# Altium PCB laser_show.PcbDoc (part 2 of 2)
Units mm, origin at the board's own origin, x right, y up, seen from the top; angles counter-clockwise.
Board outline 180 x 50 mm, 2 copper layers (Top Layer, Bottom Layer); 129 components, 122 nets, 459 pads, 223 vias.
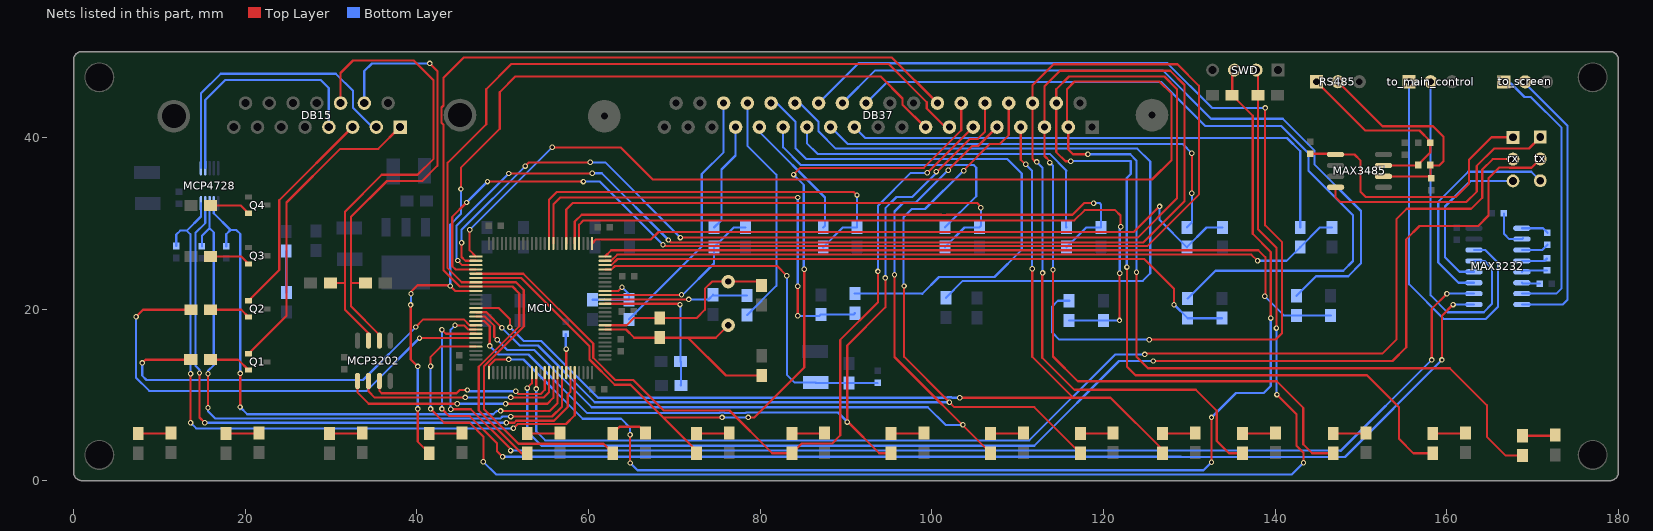
[diagram p2: the nets of this part, all layers, seen from the top]

## Via types
v1: diameter 0.635, hole 0.381, Top Layer to Bottom Layer, 223 vias

## Nets (pads, with @x,y where several pads share a name; then routed paths per layer and width w, separated by ;. In a path a pad name is that pad's centre, name@x,y a point inside that pad or via, vN(x,y) a via of type N, cw(c..) or ccw(c..) an arc to the next point about the centre after c; other vN are vias at no path point) (continued)
green_channel1_adc_con: DB37.32 R45.2 | length 82.9
  Bottom Layer w0.254: DB37.32@84.045,43.993 84.604,43.993 86.813,41.783 86.813,40.691 88.82,38.684 123.948,38.684 125.447,37.186 125.447,24.155 124.571,23.279 103.616,23.279 R45.2@101.647,21.311
green_channel1_state: DB37.5 led7.2 MCU.65 | length 111.6
  Top Layer w0.254: MCU.65@46.878,19.117 47.935,19.117 49.018,18.034 49.018,16.764 v1(49.374,16.408) ; v1(95.653,23.978) 95.653,14.403 led7.2@106.855,3.2 ; v1(101.901,36.17) 101.876,36.17 104.695,38.989 105.381,38.989 DB37.5@107.591,41.199
  Bottom Layer w0.254: v1(49.374,16.408) 50.568,15.215 53.717,15.215 60.372,8.56 99.539,8.56 101.596,6.502 v1(103.628,6.502) ; v1(95.653,23.978) 95.653,31.369 96.694,32.41 98.116,32.41 101.876,36.17 v1(101.901,36.17)
green_channel2_adc: MCU.32 R47.1 R48.2 | length 60.2
  Top Layer w0.254: MCU.32@57.403,27.642 57.403,31.6 58.162,32.36 105.279,32.36 105.711,31.928 v1(105.711,31.801)
  Bottom Layer w0.254: R47.1@101.52,27.203 103.806,29.489 R48.2@105.533,29.489 105.711,29.667 v1(105.711,31.801)
green_channel2_adc_con: DB37.14 R47.2 | length 34.3
  Bottom Layer w0.254: DB37.14@82.673,41.199 82.673,38.837 84.731,36.779 104.873,36.779 105.178,36.474 105.178,33.147 R47.2@101.52,29.489
green_channel2_state: DB37.24 led8.2 MCU.66 | length 101.9
  Top Layer w0.254: MCU.66@46.878,18.617 47.826,18.617 48.485,17.958 v1(48.485,15.697) ; v1(94.586,23.622) 94.586,20.193 90.141,15.748 v1(90.141,6.833) 90.242,6.833 93.875,3.2 led8.2@95.264,3.2 ; v1(100.529,36.017) 100.529,35.916 104.441,39.827 105.355,39.827 106.194,40.665 DB37.24@106.194,43.993
  Bottom Layer w0.254: v1(48.485,15.697) 49.488,14.694 53.019,14.694 59.839,7.874 75.261,7.874 75.324,7.938 75.798,7.938 75.861,7.874 78.309,7.874 78.372,7.938 89.061,7.938 90.166,6.833 v1(90.141,6.833) ; v1(94.586,23.622) 94.586,31.75 95.881,33.045 97.735,33.045 100.529,35.839 v1(100.529,36.017)
green_channel3_adc: MCU.35 R49.1 R50.2 | length 53.9
  Top Layer w0.254: MCU.35@55.903,27.642 55.903,32.183 56.714,32.995 v1(84.375,32.995) ; v1(84.375,19.202) v1(84.375,22.657)
  Bottom Layer w0.254: v1(84.375,19.202) 86.915,19.202 R50.2@87.067,19.355 90.877,19.355 R49.1@91.03,19.507 ; v1(84.375,22.657) v1(84.375,32.995)
green_channel3_adc_con: DB37.33 R49.2 | length 64.9
  Bottom Layer w0.254: DB37.33@81.276,43.993 81.937,43.993 84.121,41.808 84.121,38.735 85.391,37.465 108.81,37.465 110.486,35.789 110.486,26.899 107.311,23.724 100.834,23.724 98.878,21.768 98.853,21.793 R49.2@91.03,21.793
green_channel3_state: DB37.6 led9.2 MCU.55 | length 96.5
  Top Layer w0.254: MCU.55@46.878,24.117 52.41,24.117 60.55,15.977 60.55,14.309 63.141,11.718 65.232,11.718 68.772,8.179 76.425,8.179 81.403,3.2 led9.2@83.699,3.2 84.816,4.318 88.363,4.318 89.328,5.283 89.328,16.408 93.722,20.803 v1(93.722,24.384) ; v1(99.463,35.865) 99.463,35.839 DB37.6@104.822,41.199
  Bottom Layer w0.254: v1(93.722,24.384) 93.722,32.029 97.558,35.865 v1(99.463,35.865)
green_channel4_adc: MCU.36 R51.1 R52.2 | length 50.2
  Top Layer w0.254: MCU.36@55.403,27.642 55.403,32.725 56.308,33.63 90.903,33.63 91.258,33.274 v1(91.284,33.274)
  Bottom Layer w0.254: R51.1@87.347,27.203 89.633,29.489 R52.2@91.284,29.489 v1(91.284,33.274)
green_channel4_adc_con: DB37.15 R51.2 | length 15
  Bottom Layer w0.254: DB37.15@79.905,41.199 79.905,40.64 87.55,32.995 87.55,29.693 R51.2@87.347,29.489
green_channel4_state: DB37.25 led10.2 MCU.56 | length 101.9
  Top Layer w0.254: MCU.56@46.878,23.617 52.148,23.617 60.118,15.646 60.118,14.117 63.059,11.176 64.893,11.176 68.703,7.366 ; led10.2@72.59,3.2 72.59,3.479 68.703,7.366 ; v1@75.536,7.366 68.703,7.366 ; v1(78.609,7.366) 79.32,7.366 85.137,13.183 v1(85.137,24.638) ; v1(83.892,35.662) 83.867,35.662 84.654,36.449 99.056,36.449 103.425,40.818 DB37.25@103.425,43.993
  Bottom Layer w0.254: v1(75.561,7.366) v1(78.609,7.366) ; v1(83.892,35.662) 85.086,34.468 85.086,24.689 v1(85.137,24.638)
green_channel5_adc: MCU.15 R53.1 R54.2 | length 16.8
  Top Layer w0.254: MCU.15@61.928,21.117 61.95,21.095 71.644,21.095 v1(71.666,21.117)
  Bottom Layer w0.254: v1(71.666,21.117) 73.97,21.117 R54.2@74.52,21.666 74.596,21.59 R53.1@78.482,21.59
green_channel5_adc_con: DB37.34 R53.2 | length 27.5
  Bottom Layer w0.254: R53.2@78.482,19.304 81.886,22.708 81.886,35.662 78.508,39.04 DB37.34@78.508,43.993
green_channel5_state: DB37.7 led11.2 MCU.57 | length 124.7
  Top Layer w0.254: led11.2@62.328,3.2 led11.2@62.828,3.2 61.736,4.293 51.838,4.293 47.824,8.306 47.824,13.335 52.447,17.958 52.447,22.225 51.555,23.117 MCU.57@46.878,23.117 45.231,23.117 43.583,24.765 43.583,37.033 48.078,41.529 48.078,45.618 50.999,48.539 94.967,48.539 99.412,44.094 99.412,43.358 101.571,41.199 DB37.7@102.053,41.199
green_channel6_adc: MCU.16 R55.1 R56.2 | length 20.8
  Top Layer w0.254: MCU.16@61.928,21.617 70.734,21.617 70.783,21.666 v1(70.837,21.666)
  Bottom Layer w0.254: v1(70.837,21.666) 70.913,21.59 74.621,25.298 R55.1@74.621,27.203 76.907,29.489 R56.2@78.304,29.489
green_channel6_adc_con: DB37.16 R55.2 | length 12.8
  Bottom Layer w0.254: R55.2@74.621,29.489 75.485,30.353 75.485,36.246 77.136,37.897 DB37.16@77.136,41.199
green_channel6_state: DB37.26 led12.2 MCU.58 | length 116.6
  Top Layer w0.254: led12.2@52.863,3.2 52.193,3.2 47.215,8.179 47.215,13.268 51.939,17.992 51.939,21.819 51.141,22.617 MCU.58@46.878,22.617 44.994,22.617 43.1,24.511 43.1,41.473 42.871,41.702 42.871,43.49 43.1,43.719 43.1,46.939 45.462,49.301 95.348,49.301 DB37.26@100.656,43.993
green_channel7_adc: MCU.17 R57.1 R58.2 | length 8.2
  Top Layer w0.254: MCU.17@61.928,22.117 63.49,22.117 v1(63.903,22.53)
  Bottom Layer w0.254: R58.2@60.448,21.082 R57.1@64.715,21.082 64.715,21.717 v1(63.903,22.53)
green_channel7_adc_con: DB37.35 R57.2 | length 29.8
  Bottom Layer w0.254: R57.2@64.715,18.796 73.199,27.28 73.199,35.738 75.739,38.278 DB37.35@75.739,43.993
green_channel7_state: DB37.8 led13.2 MCU.59 | length 106.1
  Top Layer w0.254: v1@39.29,20.472 39.29,14.122 v1(40.103,13.31) ; v1(39.315,21.793) 39.315,22.022 40.065,22.771 43.799,22.771 v1(43.887,22.682) 44.453,22.117 MCU.59@46.878,22.117 ; v1(40.103,8.356) 40.103,4.547 led13.2@41.449,3.2 ; v1(45.132,33.985) 45.132,36.474 49.653,40.996 49.653,45.263 51.482,47.092 94.032,47.092 96.592,44.531 96.592,43.815 99.209,41.199 DB37.8@99.285,41.199
  Bottom Layer w0.254: v1(39.265,20.472) 39.315,20.472 v1(39.315,21.793) ; v1(40.103,8.356) v1(40.103,13.31) ; v1(43.887,22.682) 43.887,29.82 45.132,31.064 v1(45.132,33.985)
green_dac_output: DB15.4 MCP4728.7 | length 28.2
  Bottom Layer w0.254: MCP4728.7@15.347,36.416 15.347,44.357 17.675,46.685 28.8,46.685 29.74,45.745 DB15.4@29.74,41.199
green_enable: DB15.3 Q2.3 | length 25.3
  Top Layer w0.254: Q2.3@20.384,20.965 23.974,24.555 23.974,32.664 DB15.3@32.508,41.199
green_enable_pin: MCU.70 R12.2 | length 56.6
  Top Layer w0.254: v1(7.286,19.101) 8.099,19.914 R12.2@13.687,19.914 ; v1(40.311,16.617) MCU.70@46.878,16.617
  Bottom Layer w0.254: v1(7.286,19.101) 7.286,11.989 8.81,10.465 34.159,10.465 v1(40.311,16.617)
head_temp: DB15.11 MCP3202.3 R32.1 | length 55.9
  Top Layer w0.254: R32.1@29.917,23.038 31.645,23.038 ; DB15.11@31.187,43.993 DB15.11@31.111,43.993 31.111,47.498 32.559,48.946 39.646,48.946 41.957,46.634 41.957,37.516 40.077,35.636 35.912,35.636 31.645,31.369 31.645,23.038 ; MCP3202.3@34.366,16.32 34.366,17.17 31.645,19.892 31.645,23.038
I2C1_SCL: MCP4728.2 MCU.92 R10.1 | length 69.2
  Top Layer w0.254: v1(19.402,8.585) 19.427,8.585 v1(19.427,12.497) ; v1(49.755,8.128) 55.47,8.128 56.403,9.061 MCU.92@56.403,12.592
  Bottom Layer w0.254: MCP4728.2@16.347,32.316 16.347,31.148 18.284,29.21 ; R10.1@17.802,27.318 17.802,28.727 18.284,29.21 ; v1@19.402,8.331 v1(19.402,8.585) 20.24,7.747 48.917,7.747 49.298,8.128 v1(49.755,8.128) ; v1(19.427,12.497) 19.427,28.753 18.97,29.21 18.284,29.21
I2C1_SDA: MCP4728.3 MCU.93 R9.1 | length 73.3
  Top Layer w0.254: v1(15.668,8.484) v1(15.668,12.446) ; v1(50.949,7.468) 55.749,7.468 56.903,8.621 MCU.93@56.903,12.592
  Bottom Layer w0.254: R9.1@14.957,27.292 14.957,28.523 15.847,29.412 ; v1(15.668,8.484) 15.668,8.103 16.544,7.226 49.729,7.226 49.971,7.468 v1(50.949,7.468) ; v1(15.668,12.446) 15.668,12.802 16.328,13.462 16.328,28.931 15.847,29.412 ; MCP4728.3@15.847,32.316 15.847,29.412
L\D\A\C: MCP4728.4 MCU.95 | length 73.7
  Top Layer w0.254: v1(14.677,12.548) 14.677,7.366 v1(15.287,6.756) ; v1(50.441,6.756) 51.359,6.756 51.587,6.985 55.982,6.985 57.578,8.581 57.578,10.033 57.903,10.358 MCU.95@57.903,12.592
  Bottom Layer w0.254: v1(14.677,12.548) 14.677,12.929 14.22,13.386 14.22,28.88 15.347,30.006 MCP4728.4@15.347,32.316 ; v1(15.287,6.756) v1(50.441,6.756)
main_control_uart_rx: MCU.87 rx.2 | length 144.8
  Top Layer w0.254: v1(53.903,10.685) MCU.87@53.903,12.592 ; v1(124.812,14.707) 124.939,14.834 152.523,14.834 154.123,16.434 154.123,30.455 155.343,31.674 162.836,31.674 164.131,32.969 164.131,36.246 165.35,37.465 rx.2@167.712,37.465
  Bottom Layer w0.254: v1(53.903,10.685) 53.903,5.758 54.962,4.699 111.35,4.699 121.357,14.707 v1(124.812,14.707)
main_control_uart_tx: MCU.86 tx.2 | length 149.6
  Top Layer w0.254: v1(52.854,10.795) 53.403,11.344 MCU.86@53.403,12.592 ; v1(125.802,13.945) 153.666,13.945 155.266,15.545 155.266,28.118 156.816,29.667 163.648,29.667 164.868,30.886 164.868,35.23 166.138,36.5 167.258,36.5 167.297,36.461 169.858,36.461 tx.2@170.887,37.49
  Bottom Layer w0.254: v1(52.854,10.795) 52.854,5.74 54.53,4.064 111.934,4.064 121.815,13.945 v1(125.802,13.945)
NetC8_1: C8.1 C9.2 MCU.22 R1.1 | length 44.3
  Top Layer w0.254: MCU.22@61.928,24.617 62.692,24.617 63.079,25.005 81.981,25.005 v1(83.109,23.876)
  Bottom Layer w0.254: v1(83.109,23.876) 83.109,12.34 84.029,11.421 C8.1@86.47,11.421 86.512,11.379 C9.2@90.344,11.379 93.662,11.379 R1.1@93.675,11.392
NetC10_2: C10.2 MCU.14 R3.1 | length 18.4
  Top Layer w0.254: MCU.14@61.928,20.617 70.651,20.617 70.659,20.609 v1(70.659,20.523)
  Bottom Layer w0.254: v1(70.659,20.523) 70.71,20.472 70.71,13.894 R3.1@70.735,13.868 70.786,13.818 C10.2@70.786,11.1 C10.2@70.735,11.151
NetC19_1: C19.1 MAX3232.3 | length 3.2
  Bottom Layer w0.254: MAX3232.3@168.754,26.873 171.103,26.873 C19.1@171.726,27.496
NetC19_2: C19.2 MAX3232.1 | length 3.2
  Bottom Layer w0.254: MAX3232.1@168.754,29.413 171.205,29.413 C19.2@171.726,28.892
NetC20_1: C20.1 MAX3232.5 | length 3
  Bottom Layer w0.254: MAX3232.5@168.754,24.333 168.919,24.498 C20.1@171.675,24.498
NetC20_2: C20.2 MAX3232.4 | length 3
  Bottom Layer w0.254: MAX3232.4@168.754,25.603 171.383,25.603 C20.2@171.675,25.895
NetC22_1: C22.1 MAX3232.2 | length 4.9
  Bottom Layer w0.254: C22.1@166.658,31.14 166.658,28.766 167.281,28.143 MAX3232.2@168.754,28.143 MAX3232.2@168.868,28.258
NetC23_2: C23.2 MAX3232.6 | length 2.1
  Bottom Layer w0.254: MAX3232.6@168.754,23.063 168.855,22.962 C23.2@170.824,22.962
Netled1_1: led1.1 R15.1 | length 3.8
  Top Layer w0.254: led1.1@168.826,5.232 172.566,5.232 R15.1@172.633,5.299
Netled2_1: led2.1 R16.1 | length 3.8
  Top Layer w0.254: led2.1@158.359,5.486 162.1,5.486 R16.1@162.167,5.553
Netled3_1: led3.1 R17.1 | length 3.8
  Top Layer w0.254: led3.1@146.768,5.486 150.508,5.486 R17.1@150.575,5.553
Netled4_1: led4.1 R18.1 | length 3.8
  Top Layer w0.254: led4.1@136.218,5.486 139.959,5.486 R18.1@140.026,5.553
Netled5_1: led5.1 R19.1 | length 3.8
  Top Layer w0.254: led5.1@126.888,5.486 130.628,5.486 R19.1@130.695,5.553
Netled6_1: led6.1 R20.1 | length 3.8
  Top Layer w0.254: led6.1@117.303,5.486 121.044,5.486 R20.1@121.111,5.553
Netled7_1: led7.1 R21.1 | length 3.8
  Top Layer w0.254: led7.1@106.855,5.486 110.596,5.486 R21.1@110.663,5.553
Netled8_1: led8.1 R22.1 | length 3.8
  Top Layer w0.254: led8.1@95.264,5.486 99.005,5.486 R22.1@99.072,5.553
Netled9_1: led9.1 R23.1 | length 3.8
  Top Layer w0.254: led9.1@83.699,5.486 87.439,5.486 R23.1@87.506,5.553
Netled10_1: led10.1 R24.1 | length 3.8
  Top Layer w0.254: led10.1@72.59,5.486 76.331,5.486 R24.1@76.398,5.553
Netled11_1: led11.1 R25.1 | length 4.4
  Top Layer w0.254: led11.1@62.828,5.486 63.616,6.274 65.915,6.274 R25.1@66.636,5.553
Netled12_1: led12.1 R26.1 | length 3.8
  Top Layer w0.254: led12.1@52.863,5.486 56.603,5.486 R26.1@56.67,5.553
Netled13_1: led13.1 R27.1 | length 3.8
  Top Layer w0.254: led13.1@41.449,5.486 45.19,5.486 R27.1@45.257,5.553
Netled14_1: led14.1 R28.1 | length 3.8
  Top Layer w0.254: led14.1@29.833,5.486 33.574,5.486 R28.1@33.641,5.553
Netled15_1: led15.1 R29.1 | length 3.8
  Top Layer w0.254: led15.1@17.785,5.486 21.525,5.486 R29.1@21.592,5.553
Netled16_1: led16.1 R30.1 | length 3.8
  Top Layer w0.254: led16.1@7.54,5.486 11.281,5.486 R30.1@11.348,5.553
NetMAX3232_7: MAX3232.7 to_screen.1 | length 32.5
  Bottom Layer w0.254: to_screen.1@166.635,46.279 167.484,46.279 169.059,44.704 169.795,44.704 173.377,41.123 173.377,22.428 172.742,21.793 MAX3232.7@168.754,21.793
NetMAX3232_8: MAX3232.8 to_screen.2 | length 32.8
  Bottom Layer w0.254: MAX3232.8@168.754,20.523 173.504,20.523 174.062,21.082 174.062,41.351 to_screen.2@169.135,46.279
NetMAX3232_13: MAX3232.13 to_main_control.2 | length 39.6
  Bottom Layer w0.254: to_main_control.2@158.111,46.203 158.111,21.59 160.067,19.634 164.309,19.634 165.274,20.599 165.274,24.714 164.385,25.603 MAX3232.13@163.166,25.603
NetMAX3232_14: MAX3232.14 to_main_control.1 | length 44.5
  Bottom Layer w0.254: to_main_control.1@155.611,46.203 155.611,22.896 159.661,18.847 164.537,18.847 165.96,20.269 165.96,25.4 164.487,26.873 MAX3232.14@163.166,26.873
NetMAX3485_6: MAX3485.6 R68.2 R69.2 RS485.2 | length 26.6
  Top Layer w0.254: RS485.2@147.316,46.482 152.498,41.3 158.391,41.3 159.61,40.081 159.61,37.211 159.127,36.728 158.099,36.728 R68.2@158.099,35.331 ; MAX3485.6@152.625,35.458 157.972,35.458 R68.2@158.099,35.331 ; R68.2@158.213,35.217 R68.2@158.099,35.331
NetMAX3485_7: MAX3485.7 R67.1 R69.1 RS485.1 | length 23.5
  Top Layer w0.254: RS485.1@144.816,46.482 150.506,40.792 156.828,40.792 158.073,39.548 158.073,38.227 156.574,36.728 MAX3485.7@152.625,36.728
NetMCU_94: MCU.94 R2.2 | length 4.5
  Top Layer w0.254: MCU.94@57.4,12.589 MCU.94@57.403,12.592 v1(57.403,15.339)
  Bottom Layer w0.254: R2.2@57.349,17.107 57.349,15.392 v1(57.403,15.339)
NetPowerLed_1: PowerLed.1 R7.2 | length 4.8
  Bottom Layer w0.254: R7.2@24.787,26.746 24.787,21.946 PowerLed.1@24.812,21.92
NetQ1_2: Q1.2 R11.1 | length 4.9
  Top Layer w0.254: R11.1@15.947,14.097 19.18,14.097 Q1.2@20.384,12.893
NetQ2_2: Q2.2 R12.1 | length 4.8
  Top Layer w0.254: R12.1@15.973,19.914 19.536,19.914 Q2.2@20.384,19.065
NetQ3_2: Q3.2 R13.1 | length 4.8
  Top Layer w0.254: R13.1@15.973,26.111 19.536,26.111 Q3.2@20.384,25.263
NetQ4_2: Q4.2 R14.1 | length 4.8
  Top Layer w0.254: R14.1@15.973,32.055 19.485,32.055 Q4.2@20.384,31.156
RCC_OSC_IN: C11.1 MCU.8 R4.1 Y1.1 | length 25.8
  Top Layer w0.254: MCU.8@61.928,17.617 64.371,17.617 65.325,16.662 R4.1@68.297,16.662 71.599,16.662 ; Y1.1@76.276,18.11 74.828,16.662 71.599,16.662 ; C11.1@80.184,12.268 80.166,12.251 76.011,12.251 71.599,16.662
RCC_OSC_OUT: C12.1 MCU.9 R4.2 Y1.2 | length 21.9
  Top Layer w0.254: MCU.9@61.928,18.117 64.443,18.117 65.274,18.948 R4.2@68.297,18.948 72.593,18.948 73.558,19.914 73.558,22.352 74.397,23.19 Y1.2@76.276,23.19 79.701,23.19 C12.1@80.133,22.758
RDY/B\S\Y\: MCP4728.5 MCU.96 R8.1 | length 79.8
  Top Layer w0.254: v1(13.636,6.756) v1(13.636,12.471) ; v1(51.257,6.096) 51.761,6.6 51.761,6.604 57.375,6.604 58.403,7.632 MCU.96@58.403,12.592
  Bottom Layer w0.254: R8.1@11.96,27.343 11.96,28.677 12.417,29.134 13.204,29.134 ; v1(13.636,6.756) 14.296,6.096 v1@51.253,6.096 ; v1(13.636,12.471) 13.611,12.497 13.611,28.727 13.204,29.134 ; MCP4728.5@14.847,32.316 14.847,30.776 13.204,29.134
red_channel1_adc: MCU.23 R33.1 R34.2 | length 76.1
  Top Layer w0.254: MCU.23@61.928,25.117 62.653,25.117 63.368,25.832 124.736,25.832 128.215,22.352 v1(128.215,20.498)
  Bottom Layer w0.254: v1(128.215,20.498) 128.215,20.52 R33.1@129.805,18.931 R34.2@133.788,18.931
red_channel1_adc_con: DB37.29 R33.2 | length 91.8
  Bottom Layer w0.254: DB37.29@92.351,43.993 94.814,46.457 126.742,46.457 131.873,41.326 140.712,41.326 143.887,38.151 143.887,36.093 149.069,30.912 149.069,25.603 147.926,24.46 133.048,24.46 R33.2@129.805,21.217
red_channel1_state: DB37.2 led1.2 MCU.51 | length 202.8
  Top Layer w0.254: v1@46.148,29.159 46.148,26.847 MCU.51@46.878,26.117 ; v1(55.775,38.837) 63.725,38.837 67.471,35.09 125.663,35.09 127.936,37.363 127.936,45.085 126.514,46.507 116.633,46.507 115.744,45.618 115.744,41.351 DB37.2@115.896,41.199 115.896,38.583 116.468,38.011 116.481,38.024 v1(118.182,38.024) ; v1(123.847,24.282) 123.847,14.453 125.193,13.106 160.346,13.106 164.664,8.788 164.664,5.108 166.826,2.946 led1.2@168.826,2.946
  Bottom Layer w0.254: v1(46.173,29.235) 46.173,29.239 55.771,38.837 v1(55.775,38.837) ; v1(118.182,38.024) 123.11,38.024 123.847,37.287 v1(123.847,24.282)
red_channel2_adc: MCU.24 R35.1 R36.2 | length 86.9
  Top Layer w0.254: MCU.24@61.928,25.617 62.614,25.617 63.337,26.34 137.232,26.34 v1(137.955,25.617)
  Bottom Layer w0.254: v1(137.955,25.617) 141.335,25.617 R35.1@142.922,27.203 145.208,29.489 R36.2@146.63,29.489
red_channel2_adc_con: DB37.11 R35.2 | length 62
  Bottom Layer w0.254: DB37.11@90.979,41.199 92.249,39.929 141.373,39.929 142.922,38.379 R35.2@142.922,29.489
red_channel2_state: DB37.21 led2.2 MCU.52 | length 207.8
  Top Layer w0.254: v1(45.208,27.711) 45.208,26.06 45.652,25.617 MCU.52@46.878,25.617 ; v1(52.625,36.652) 53.059,37.086 v1(60.192,37.086) ; v1(70.71,28.321) 123.999,28.321 128.571,32.893 128.571,45.618 127.098,47.092 115.973,47.092 114.499,45.618 DB37.21@114.499,43.993 114.499,38.278 115.566,37.211 v1(116.201,37.211) ; v1(122.729,24.892) 122.729,13.284 123.72,12.294 150.694,12.294 154.428,8.56 154.428,4.877 156.105,3.2 led2.2@158.359,3.2
  Bottom Layer w0.254: v1(45.208,27.711) 45.208,29.235 v1(52.625,36.652) ; v1(60.192,37.086) 61.945,37.086 v1(70.71,28.321) ; v1(116.201,37.211) 116.227,37.236 123.186,37.236 123.186,35.738 122.704,35.255 122.704,24.917 v1(122.729,24.892)
red_channel3_adc: MCU.25 R37.1 R38.2 | length 90.8
  Top Layer w0.254: MCU.25@61.928,26.117 62.659,26.848 138.045,26.848 138.858,26.035 138.858,21.565 v1(138.782,21.488)
  Bottom Layer w0.254: v1(138.782,21.488) 141.009,19.261 R37.1@142.488,19.261 R38.2@146.472,19.261
red_channel3_adc_con: DB37.30 R37.2 | length 84.9
  Bottom Layer w0.254: DB37.30@89.582,43.993 93.392,47.803 126.895,47.803 132.533,42.164 140.89,42.164 144.573,38.481 144.573,36.855 150.009,31.42 150.009,25.324 148.51,23.825 144.766,23.825 R37.2@142.488,21.547
red_channel3_state: DB37.3 led3.2 MCU.53 | length 202
  Top Layer w0.254: v1(44.751,25.654) 45.288,25.117 MCU.53@46.878,25.117 ; v1(50.695,35.789) v1@60.397,35.789 ; v1(69.313,28.042) 69.605,27.749 124.621,27.749 129.435,32.563 129.435,46.101 127.784,47.752 114.931,47.752 113.128,45.949 DB37.3@113.128,41.199 113.128,37.821 113.737,37.211 v1(113.737,37.059) ; v1(114.118,24.562) 114.118,14.478 117.014,11.582 140.179,11.582 143.278,8.484 143.278,4.242 144.319,3.2 led3.2@146.768,3.2
  Bottom Layer w0.254: v1(44.751,25.654) 44.637,25.768 44.637,29.731 v1(50.695,35.789) ; v1(60.448,35.814) 61.54,35.814 v1(69.313,28.042) ; v1(113.737,37.059) 114.118,36.678 114.118,24.613 114.093,24.587 v1(114.118,24.562)
red_channel4_adc: MCU.26 R39.1 R40.2 | length 79.1
  Top Layer w0.254: MCU.26@60.403,27.642 60.879,28.118 67.281,28.118 68.144,28.981 123.516,28.981 126.488,31.953 v1(126.539,31.953)
  Bottom Layer w0.254: v1(126.539,31.953) 126.539,30.378 R39.1@129.714,27.203 132,29.489 R40.2@133.88,29.489
red_channel4_adc_con: DB37.12 R39.2 | length 52.3
  Top Layer w0.254: v1(130.298,33.477) v1(130.298,38.151)
  Bottom Layer w0.254: DB37.12@88.21,41.199 90.192,39.218 129.231,39.218 v1(130.298,38.151) ; R39.2@129.714,29.489 130.298,30.074 v1(130.298,33.477)
red_channel4_state: DB37.22 led4.2 MCU.54 | length 199.2
  Top Layer w0.254: v1(45.792,32.41) 44.116,30.734 44.116,24.994 44.493,24.617 MCU.54@46.878,24.617 ; v1(48.231,34.849) v1@59.381,34.849 ; v1(68.678,27.483) 68.83,27.33 125.117,27.33 131.111,33.325 131.111,46.025 128.622,48.514 114.169,48.514 111.731,46.076 DB37.22@111.731,43.993 111.731,37.49 112.086,37.135 v1(112.239,37.135) ; v1@112.874,24.003 112.874,14.326 116.608,10.592 130.755,10.592 133.194,8.153 133.194,4.623 134.616,3.2 led4.2@136.218,3.2
  Bottom Layer w0.254: v1(45.792,32.41) v1(48.231,34.849) ; v1(59.407,34.849) 61.312,34.849 v1(68.678,27.483) ; v1(112.239,37.135) 112.899,36.474 v1(112.899,24.206)
red_channel5_adc: MCU.29 R41.1 R42.2 | length 84.4
  Top Layer w0.254: MCU.29@58.903,27.642 58.903,29.824 59.407,30.328 116.608,30.328 117.801,31.521 121.357,31.521 121.992,30.886 v1@121.992,29.566 ; v1(121.865,18.669) 121.865,24.13 v1(121.891,24.155)
  Bottom Layer w0.254: R41.1@116.005,18.677 R42.2@119.988,18.677 119.996,18.669 v1(121.865,18.669) ; v1(121.891,24.155) 121.891,29.464 v1(122.018,29.591)
red_channel5_adc_con: DB37.31 R41.2 | length 115.9
  Top Layer w0.254: v1(125.32,16.434) 140.052,16.434 140.814,17.196 140.814,27.762 138.833,29.743 v1(138.833,43.434)
  Bottom Layer w0.254: DB37.31@86.813,43.993 91.462,48.641 127.428,48.641 132.635,43.434 v1(138.833,43.434) ; R41.2@116.005,20.963 114.685,20.963 113.991,20.269 113.991,17.297 114.855,16.434 v1(125.32,16.434)
red_channel5_state: DB37.4 led5.2 MCU.63 | length 121.8
  Top Layer w0.254: MCU.63@46.878,20.117 49.552,20.117 50.847,18.821 v1(50.847,17.882) ; v1(103.247,9.652) 116.481,9.652 ; DB37.4@110.359,41.199 110.359,37.389 110.893,36.855 v1(110.943,36.855) ; v1(111.705,24.689) 111.705,14.427 116.481,9.652 ; led5.2@126.888,3.2 126.888,3.588 120.824,9.652 116.481,9.652
  Bottom Layer w0.254: v1(50.847,17.882) 52.447,16.281 54.479,16.281 61.109,9.652 101.753,9.652 101.817,9.716 102.29,9.716 102.354,9.652 v1(103.247,9.652) ; v1(110.943,36.855) 110.943,36.83 111.68,36.093 v1@111.68,24.867
red_channel6_adc: MCU.30 R43.1 R44.2 | length 72.5
  Top Layer w0.254: MCU.30@58.403,27.642 58.403,30.187 59.204,30.988 101.144,30.988 101.182,30.95 101.655,30.95 101.693,30.988 116.379,30.988 117.725,32.334 v1(118.843,32.334)
  Bottom Layer w0.254: R43.1@115.693,27.203 117.979,29.489 R44.2@119.706,29.489 119.706,32.182 119.554,32.334 v1(118.843,32.334)
red_channel6_adc_con: DB37.13 R43.2 | length 40.2
  Bottom Layer w0.254: DB37.13@85.442,41.199 85.442,39.319 86.686,38.075 113.737,38.075 115.693,36.119 115.642,36.119 115.642,29.54 R43.2@115.693,29.489
red_channel6_state: DB37.23 led6.2 MCU.64 | length 121.1
  Top Layer w0.254: MCU.64@46.878,19.617 48.121,19.617 v1(49.907,17.831) ; v1(96.77,22.682) 96.77,14.427 v1(102.053,9.144) 102.628,8.57 111.934,8.57 led6.2@117.303,3.2 ; v1(103.704,36.119) 103.646,36.119 106.744,39.218 107.921,39.218 108.962,40.259 DB37.23@108.962,43.993
  Bottom Layer w0.254: v1(49.907,17.831) 51.99,15.748 54.124,15.748 60.728,9.144 v1(102.053,9.144) ; v1(96.77,22.682) 96.694,22.758 96.694,30.683 97.659,31.648 99.209,31.648 103.679,36.119 v1(103.704,36.119)
red_dac_output: DB15.2 MCP4728.6 | length 33.8
  Bottom Layer w0.254: MCP4728.6@14.847,36.416 14.847,45.127 17.141,47.422 30.552,47.422 32.559,45.415 32.559,43.434 34.794,41.199 DB15.2@35.277,41.199
red_enable: DB15.1 Q1.3 | length 36.3
  Top Layer w0.254: Q1.3@20.384,14.793 24.812,19.221 24.812,32.41 31.06,38.659 35.505,38.659 DB15.1@38.045,41.199
red_enable_pin: MCU.67 R11.2 | length 49.6
  Top Layer w0.254: v1(7.997,13.716) 8.378,14.097 R11.2@13.661,14.097 ; v1(39.874,17.907) 40.763,18.796 45.462,18.796 46.141,18.117 MCU.67@46.878,18.117
  Bottom Layer w0.254: v1(7.997,13.716) 7.997,12.243 8.505,11.735 33.727,11.735 v1@39.881,17.888
screen_uart_rx: MAX3232.9 MCU.69 | length 146.8
  Top Layer w0.254: v1(42.922,8.357) 43.76,7.518 46.173,7.518 49.348,4.343 49.348,3.429 v1(49.983,2.794) ; v1(42.922,17.577) 43.382,17.117 MCU.69@46.878,17.117 ; v1(159.432,14.072) 159.432,19.228 v1(160.727,20.523)
  Bottom Layer w0.254: v1(42.922,8.357) 42.935,8.369 42.935,17.564 v1(42.922,17.577) ; v1@49.983,2.769 49.996,2.781 129.011,2.781 129.024,2.769 148.129,2.769 v1(159.432,14.072) ; v1(160.727,20.523) MAX3232.9@163.166,20.523
screen_uart_tx: MAX3232.10 MCU.68 | length 145.1
  Top Layer w0.254: v1(43.938,8.331) 46.275,8.331 50.923,3.683 v1(50.923,3.505) ; v1(44.446,18.11) 44.472,18.085 45.513,18.085 45.981,17.617 MCU.68@46.878,17.617 ; v1(158.238,14.072) 158.238,20.015 v1(160.016,21.793)
  Bottom Layer w0.254: v1(43.938,8.331) 43.938,17.602 v1(44.446,18.11) ; v1(50.923,3.505) 147.57,3.505 147.621,3.454 v1(158.238,14.072) ; v1(160.016,21.793) MAX3232.10@163.166,21.793
slink_temp: DB15.10 MCP3202.2 R31.1 | length 54
  Top Layer w0.254: R31.1@34.032,23.038 32.33,23.038 ; MCP3202.2@35.636,16.32 35.636,17.014 32.33,20.32 32.33,23.038 ; v1(41.5,48.616) 42.389,47.727 42.389,36.703 40.611,34.925 36.521,34.925 32.33,30.734 32.33,23.038
  Bottom Layer w0.254: DB15.10@33.88,43.993 33.88,47.727 34.769,48.616 v1(41.5,48.616)
SPI1_MISO: MCP3202.6 MCU.90 | length 25.1
  Top Layer w0.254: MCP3202.6@34.366,11.62 34.366,10.414 35.103,9.677 45.615,9.677 v1(45.64,9.703) ; v1(50.949,9.703) 54.809,9.703 55.403,10.296 MCU.90@55.403,12.592
  Bottom Layer w0.254: v1(45.64,9.703) v1(50.949,9.703)
SPI1_MOSI: MCP3202.5 MCU.91 | length 27.9
  Top Layer w0.254: MCP3202.5@33.096,11.62 33.096,10.262 34.392,8.966 v1(44.7,8.966) ; v1(50.339,8.966) 55.216,8.966 55.903,9.653 MCU.91@55.903,12.592
  Bottom Layer w0.254: v1@44.713,8.979 v1(44.7,8.966) v1(50.339,8.966)
SPI1_SCK: MCP3202.7 MCU.89 | length 23.1
  Top Layer w0.254: MCP3202.7@35.636,11.62 35.636,10.465 35.916,10.185 44.628,10.185 45.009,10.566 v1(45.894,10.566) ; v1(51.507,10.414) 51.838,10.084 54.403,10.084 54.903,10.584 MCU.89@54.903,12.592
  Bottom Layer w0.254: v1(45.894,10.566) 46.046,10.414 v1(51.507,10.414)
SWCLK: MCU.76 R6.1 SWD.3 | length 145.8
  Top Layer w0.254: MCU.76@48.403,12.592 48.403,13.375 49.151,14.122 v1(50.72,14.122) ; v1(64.842,5.359) 64.842,2.083 v1(64.868,2.057) ; v1(132.584,2.159) v1(132.584,7.366) ; SWD.3@135.251,47.839 134.997,47.585 R6.1@134.997,44.907 137.385,42.52 137.385,28.753 139.493,26.645 v1(139.493,18.948)
  Bottom Layer w0.254: v1(50.72,14.122) 52.422,14.122 59.331,7.214 63.801,7.214 64.842,6.172 v1(64.842,5.359) ; v1(64.868,2.057) 65.706,1.219 131.644,1.219 v1(132.584,2.159) ; v1(132.584,7.366) 135.429,10.211 138.68,10.211 139.493,11.024 v1(139.493,18.948)
SWDIO: MCU.72 R5.1 SWD.2 | length 167
  Top Layer w0.254: v1(41.601,8.357) 43.202,6.756 46.148,6.756 47.748,5.156 v1(47.748,2.21) ; v1(41.601,13.335) 41.601,14.427 42.791,15.617 MCU.72@46.878,15.617 ; SWD.2@137.791,47.839 137.994,47.636 R5.1@137.994,44.907 137.994,29.312 140.153,27.153 v1(140.153,17.78) ; v1(140.204,10.033) 142.49,7.747 142.49,4.064 143.303,3.251 v1(143.303,2.083)
  Bottom Layer w0.254: v1(41.601,8.357) v1(41.601,13.335) ; v1(47.748,2.21) 49.247,0.711 141.931,0.711 v1(143.303,2.083) ; v1@140.153,10.033 v1(140.153,17.78)
uart_rx_to_rs232: MAX3232.12 rx.3 | length 19.2
  Bottom Layer w0.254: MAX3232.12@163.166,24.333 161.489,24.333 159.788,26.035 159.788,31.953 162.759,34.925 rx.3@167.712,34.925
uart_rx_to_rs485: MAX3485.1 R66.1 rx.1 | length 32.3
  Top Layer w0.254: R66.1@144.065,38.1 MAX3485.1@146.935,38.1 ; MAX3485.1@147.037,37.998 149.247,37.998 149.958,37.287 149.958,33.63 150.542,33.045 161.032,33.045 162.582,34.595 162.582,37.389 165.198,40.005 rx.1@167.712,40.005
uart_tx_to_rs232: MAX3232.11 tx.3 | length 26
  Bottom Layer w0.254: MAX3232.11@163.166,23.063 161.362,23.063 159,25.425 159,32.487 162.505,35.992 169.846,35.992 tx.3@170.887,34.95
uart_tx_to_rs485: MAX3485.4 tx.1 | length 30.1
  Top Layer w0.254: MAX3485.4@147.037,34.188 147.037,33.02 147.596,32.461 162.277,32.461 163.496,33.68 163.496,36.678 165.528,38.71 169.567,38.71 tx.1@170.887,40.03
pads on no net: AMS1117-3.3. DB15. DB37.0 MCU.1 MCU.2 MCU.3 MCU.4 MCU.5 MCU.7 MCU.12 MCU.13 MCU.38 MCU.39 MCU.40 MCU.41 MCU.42 MCU.43 MCU.44 MCU.45 MCU.46 MCU.48 MCU.73 MCU.78 MCU.79 MCU.80 MCU.81 MCU.82 MCU.83 MCU.84 MCU.85 MCU.88 MCU.97 MCU.98

## Keep-outs
Keep-Out Layer:
  lines w0.254: 5.499,47.07 ccw(c3,47) 5.5,47.016 ; 5.5,2.971 cw(c3,3) 5.5,3.023 ; 179.493,47.191 ccw(c177,47) 179.494,47.178 ; 179.498,2.895 cw(c177,3) 179.5,3.025 ; 0,1 ccw(c1,1) 1,0 179,0 ccw(c179,1) 180,1 180,49 ccw(c179,49) 179,50 165,50 25,50 1,50 ccw(c1,49) 0,49 0,1

## Silkscreen, mask and mechanical layers (free items; w line width, h text height)
Top Overlay:
  text "Draw: Fhc" at 2.337,43.586 h3.81 r270
  text "WuHuan Great Enterprise" at 176.733,42.469 h3.3 r270
  text "Check: Wxc" at 2.108,26.264 h3.81 r270
Bottom Overlay:
  text "Date: 2017/03/01" at 178.105,40.818 h3.81 r90